# EAGLE board 555timerschematic (EAGLE 9.6.2)
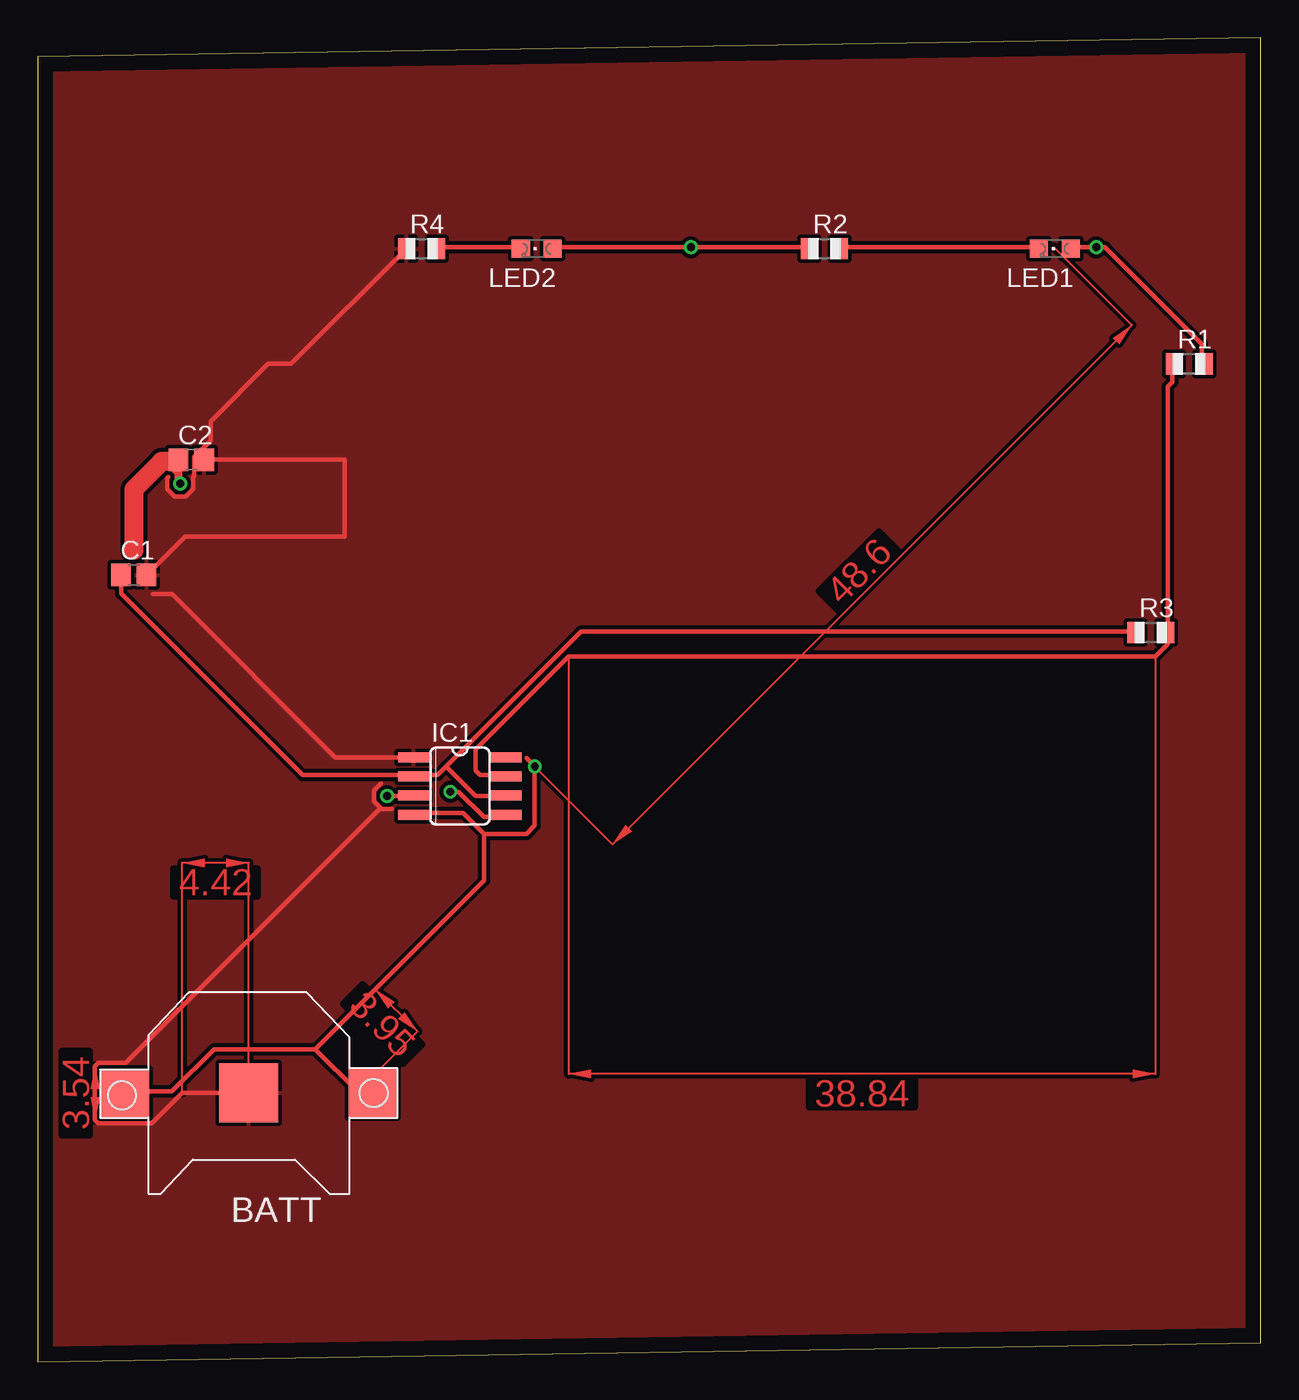
[diagram p0: board, top side]
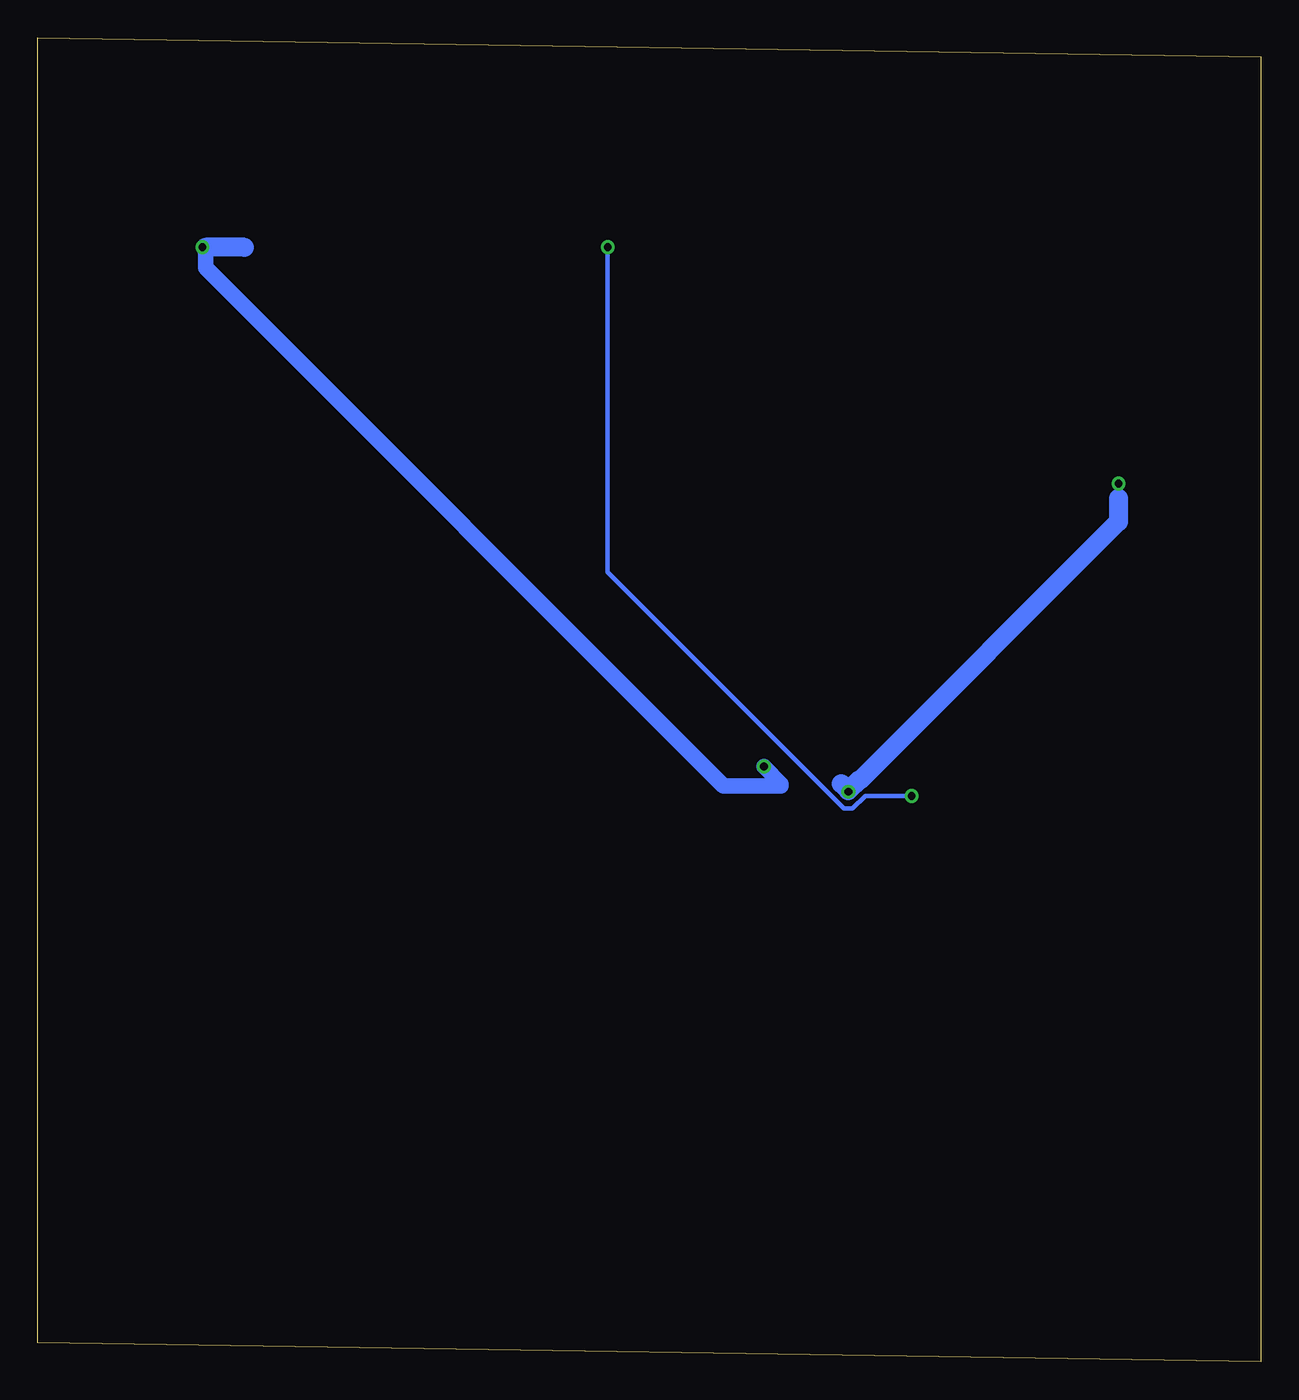
[diagram p1: board, bottom side, seen from below]

Size 80.95 x 87.62 mm. Coordinates in mm from the lower left corner, seen from the top.
Outline: 0,0 80.95,1.27 80.95,87.62 0,86.35 0,0
Copper layers (1*16): Top 0.035mm / dielectric 1.5mm / Bottom 0.035mm
Design rules "default": minimum track width 6mil, minimum drill 0.35mm, track to track 6mil, track to pad 6mil, pad to pad 6mil, via to via 6mil, smd to smd 6mil, copper to edge 40mil, drill to drill 6mil, minimum pad ring 10mil, minimum via ring 8mil, stop-mask expansion 4mil, vias tented up to drill 0mil, thermal gap 10mil
Net classes: 0 default: width 0.305 mm, drill 0.508 mm, clearance 0.254 mm

## Footprints (pad centres in the part's own frame; a part is rotated, then mirrored left to right if it is on the bottom)
CR1220-SMD = smd 3.2 x 3.2: +$1 -8.2,0; +$2 8.2,0 | smd 3.9 x 3.9: - 0,0
C0805 = smd 1.3 x 1.5: 1 -0.85,0; 2 0.85,0
SO08 = smd 0.66 x 2.032: 1 -1.905,-3.073; 2 -0.635,-3.073; 3 0.635,-3.073; 4 1.905,-3.073; 5 1.905,3.073; 6 0.635,3.073; 7 -0.635,3.073; 8 -1.905,3.073
CHIPLED_0805 = smd 1.2 x 1.2: A 0,-1.05; C 0,1.05
R0805 = smd 1.1 x 1.4: 1 -1,0; 2 1,0

## Placement (x,y rotation side)
BATT  CR1220  [CR1220-SMD]  13.97,17.78 180 top
C1  22uF  [C0805]  6.35,52.07 0 top
C2  0.01uF  [C0805]  10.16,59.69 0 top
IC1  LM555D  [SO08]  27.94,38.1 270 top
LED1  green  [CHIPLED_0805]  67.31,73.66 90 top
LED2  green  [CHIPLED_0805]  33.02,73.66 90 top
R1  1k  [R0805]  76.2,66.04 0 top
R2  100  [R0805]  52.07,73.66 0 top
R3  1k  [R0805]  73.66,48.26 0 top
R4  100  [R0805]  25.4,73.66 0 top

## Library data of the parts
BATT = adafruit
C1 C2 IC1 R1-R4 = adafruit; OC_FARNELL: unknown
LED1 LED2 = led

## Nets
CONN: C1.1 IC1.2 IC1.6 R3.1
GND: BATT.- C1.2 C2.2 IC1.1 R4.1
N$1: LED1.C R2.2
N$2: IC1.3 LED2.A R2.1
N$3: LED2.C R4.2
N$5: IC1.7 R1.1 R3.2
N$9: C2.1 IC1.5
V+: IC1.8
VCC: BATT.+$1 BATT.+$2 IC1.4 LED1.A R1.2

## Tracks (layer width: path | path; a pad name or v marks a point on that pad's centre or on a via)
CONN
  Top 0.305: 27.03,39.39 26.47,38.84 25.07,38.84 IC1.2 24.79,38.84 17.53,38.84 5.51,50.85 5.51,51.97 C1.1 | 27.03,39.39 35.97,48.34 72.57,48.34 R3.1 | 27.03,39.39 28.98,37.44 30.94,37.44 IC1.6
GND
  Top 0.305: R4.1 16.78,66.04 15.24,66.04 11.43,62.23 11.43,60.96 10.37,59.9 10.37,59.69 | 8.62,58.53 8.56,58.47 8.56,57.76 9.07,57.25 9.78,57.25 10.29,57.76 10.29,58.55 10.37,58.63 10.37,59.69 | IC1.1 19.69,40.01 8.89,50.8 7.62,50.8 | C1.2 9.74,54.61 20.32,54.61 20.32,59.69 10.37,59.69 | BATT.- 9.55,17.78 7.55,15.77 4,15.77 3.76,16.01 3.76,19.55 4,19.79 5.82,19.79 22.68,36.65 | 22.68,36.65 22.25,37.08 22.25,37.8 22.71,38.25 | 22.68,36.65 22.76,36.58 23.44,36.58
  pour Top: -3.81,90.17 -2.54,88.9 -2.54,-6.35 86.36,-6.35 83.82,-3.81 83.82,93.98 -3.81,93.98
N$1
  Top 0.305: LED1.C 66.14,73.76 53.29,73.76 R2.2
N$2  (via drill 0.51)
  Top 0.305: LED2.A 34.21,73.76 v43.23,73.76 51.05,73.76 R2.1 | v23.11,37.44 24.79,37.44 IC1.3
  Bottom 0.305: v23.11,37.44 26.19,37.44 27.03,36.6 27.58,36.6 31.05,40.07 43.23,52.25 v43.23,73.76
N$3
  Top 0.305: LED2.C 31.7,73.76 26.47,73.76 R4.2
N$5
  Top 0.305: R1.1 75.08,65.94 75.08,64.82 74.8,64.54 74.8,48.34 R3.2 74.8,48.06 74.8,47.5 73.97,46.66 35.13,46.66 28.98,40.51 28.98,39.12 29.26,38.84 30.94,38.84 IC1.7
N$9  (via drill 0.51)
  Top 0.305: v27.3,37.72 27.86,37.72 29.54,36.04 30.94,36.04 IC1.5 | C2.1 9.42,59.51 v9.42,58.12 9.18,58.36 9.18,58.77 8.85,59.09 8.39,59.09 6.35,57.05 6.35,53.71 6.35,53.34
  Top 1.27: C2.1 9.19,59.58 8.19,59.58 6.35,57.74 6.35,53.71
  Bottom 0.305: v9.42,58.12 9.42,57.15 | 9.42,55.6 10.29,54.74 v27.3,37.72
  Bottom 1.27: 9.42,57.15 9.42,55.6 26.54,38.48 26.62,38.48 26.83,38.27 27.3,37.8 27.77,38.27
VCC  (via drill 0.51)
  Top 0.305: LED1.A 68.38,73.76 v70.05,73.76 70.61,73.76 77.04,67.34 77.04,66.22 R1.2 | 29.54,34.92 28.14,36.32 25.07,36.32 IC1.4 | 29.54,34.92 32.33,34.92 32.89,35.48 v32.89,39.39 32.33,39.95 | 18.36,20.68 11.66,20.68 8.86,17.88 5.79,17.88 BATT.+$2 | 18.36,20.68 21.16,17.88 22,17.88 BATT.+$1 | 29.54,34.92 29.54,31.85 18.36,20.68
  Bottom 0.305: 69.85,73.76 v70.05,73.76
  Bottom 1.016: v32.89,39.39 31.75,38.25 31.75,38.1 35.56,38.1 69.85,72.39 69.85,73.76
  Bottom 1.27: 67.26,73.76 69.85,73.76
(copper drawn outside any net)
  shapes: Top area x5